# Altium PCB PCB.PcbDoc
Units mil, origin at the board's own origin, x right, y up, seen from the top; angles counter-clockwise.
Board outline 1633.86 x 2559.06 mil, 4 copper layers (Top Layer, Internal Plane 1, Internal Plane 2, Bottom Layer), stack 30.635 mil thick; 44 components, 29 nets, 160 pads, 110 vias.
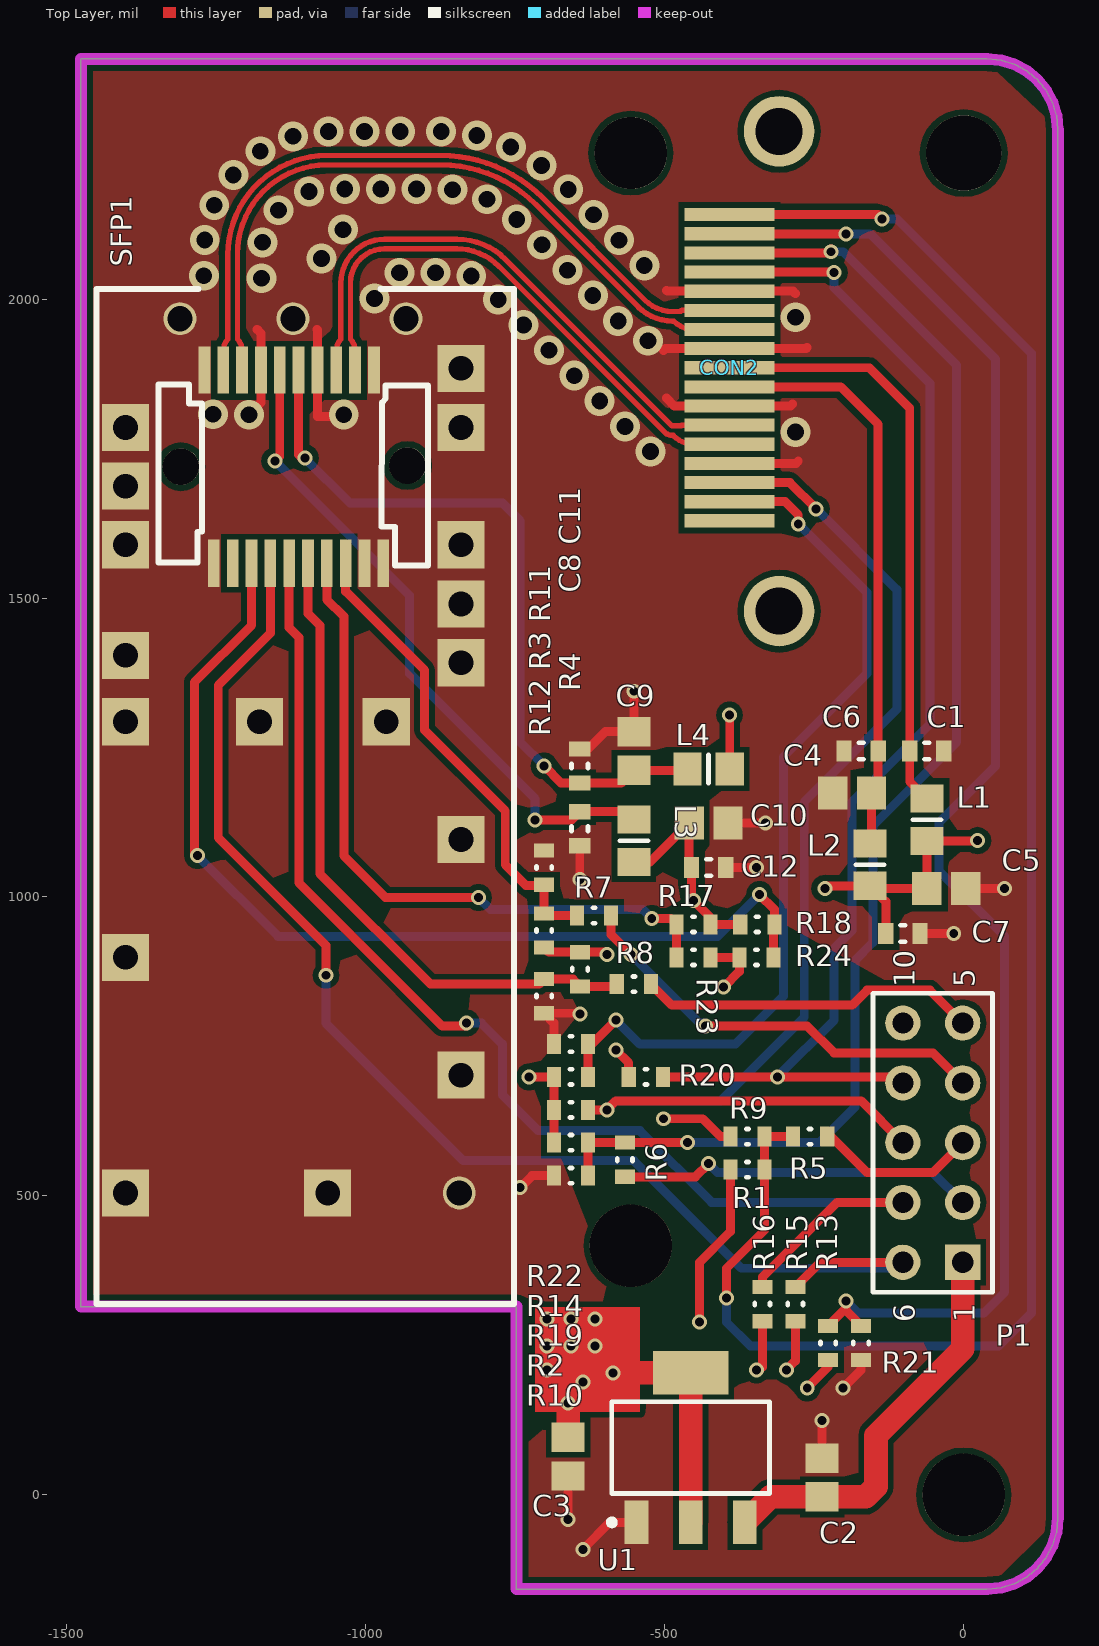
[diagram p0: Top Layer view]
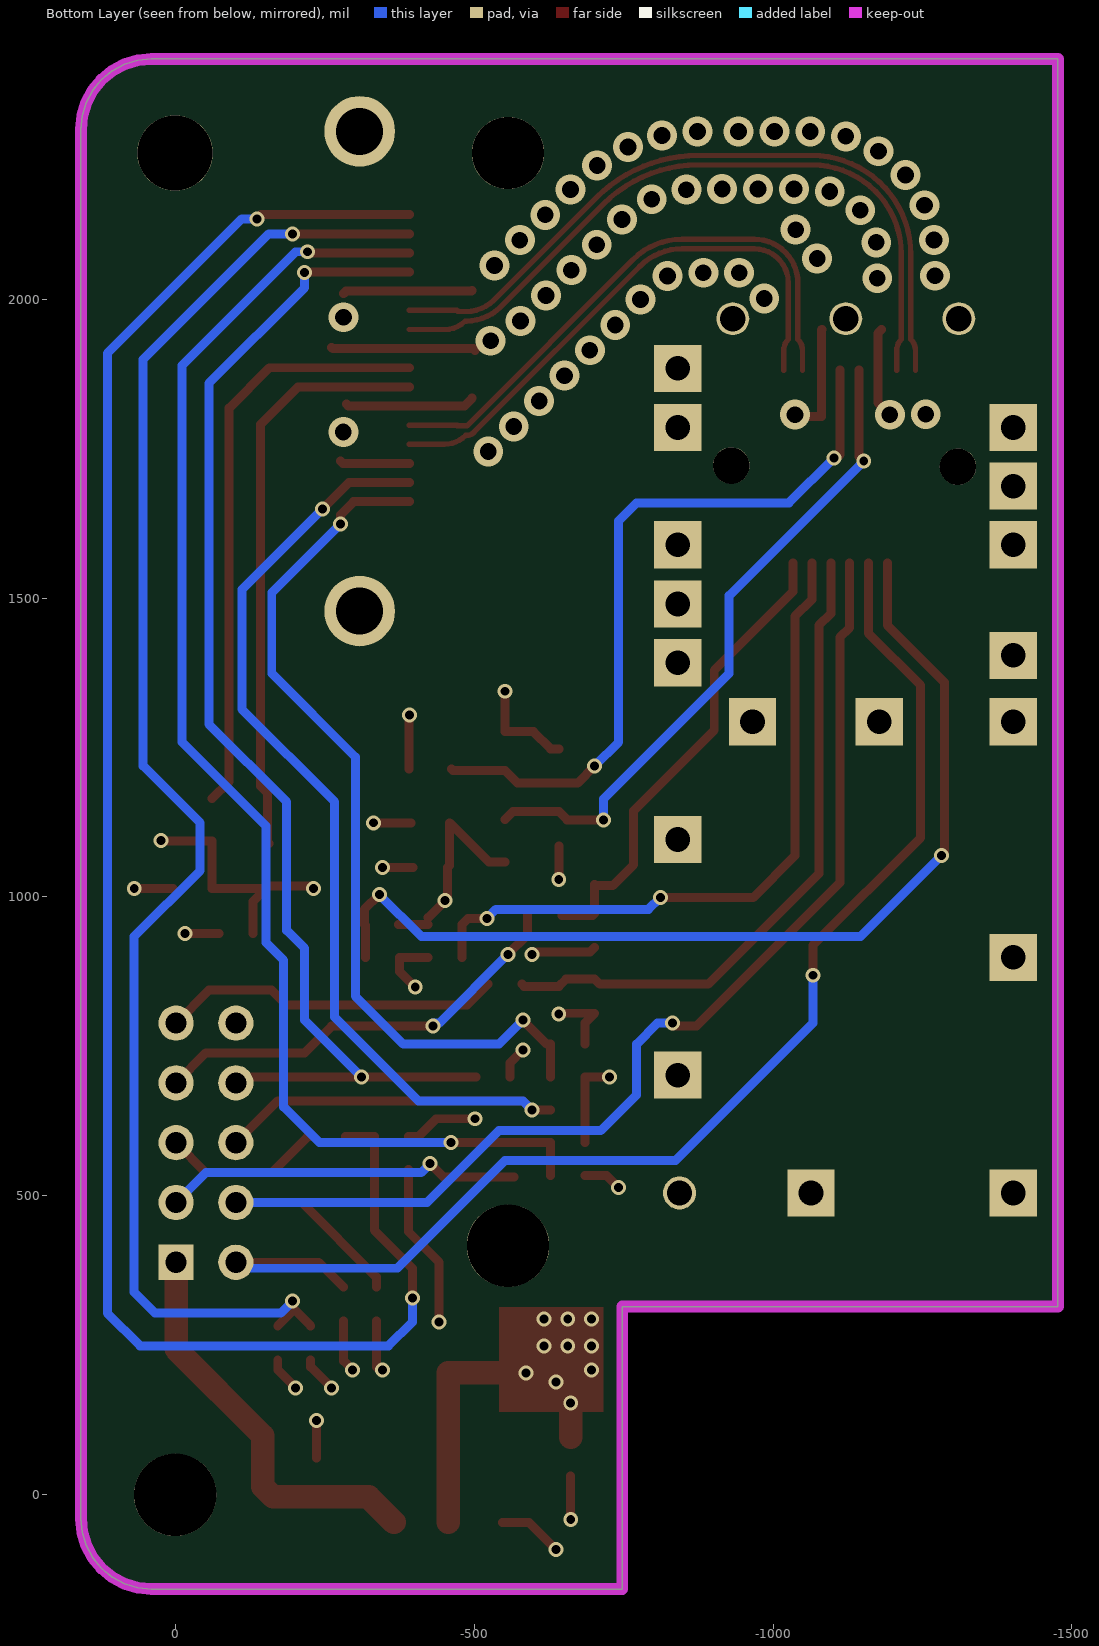
[diagram p1: Bottom Layer view, seen from below]
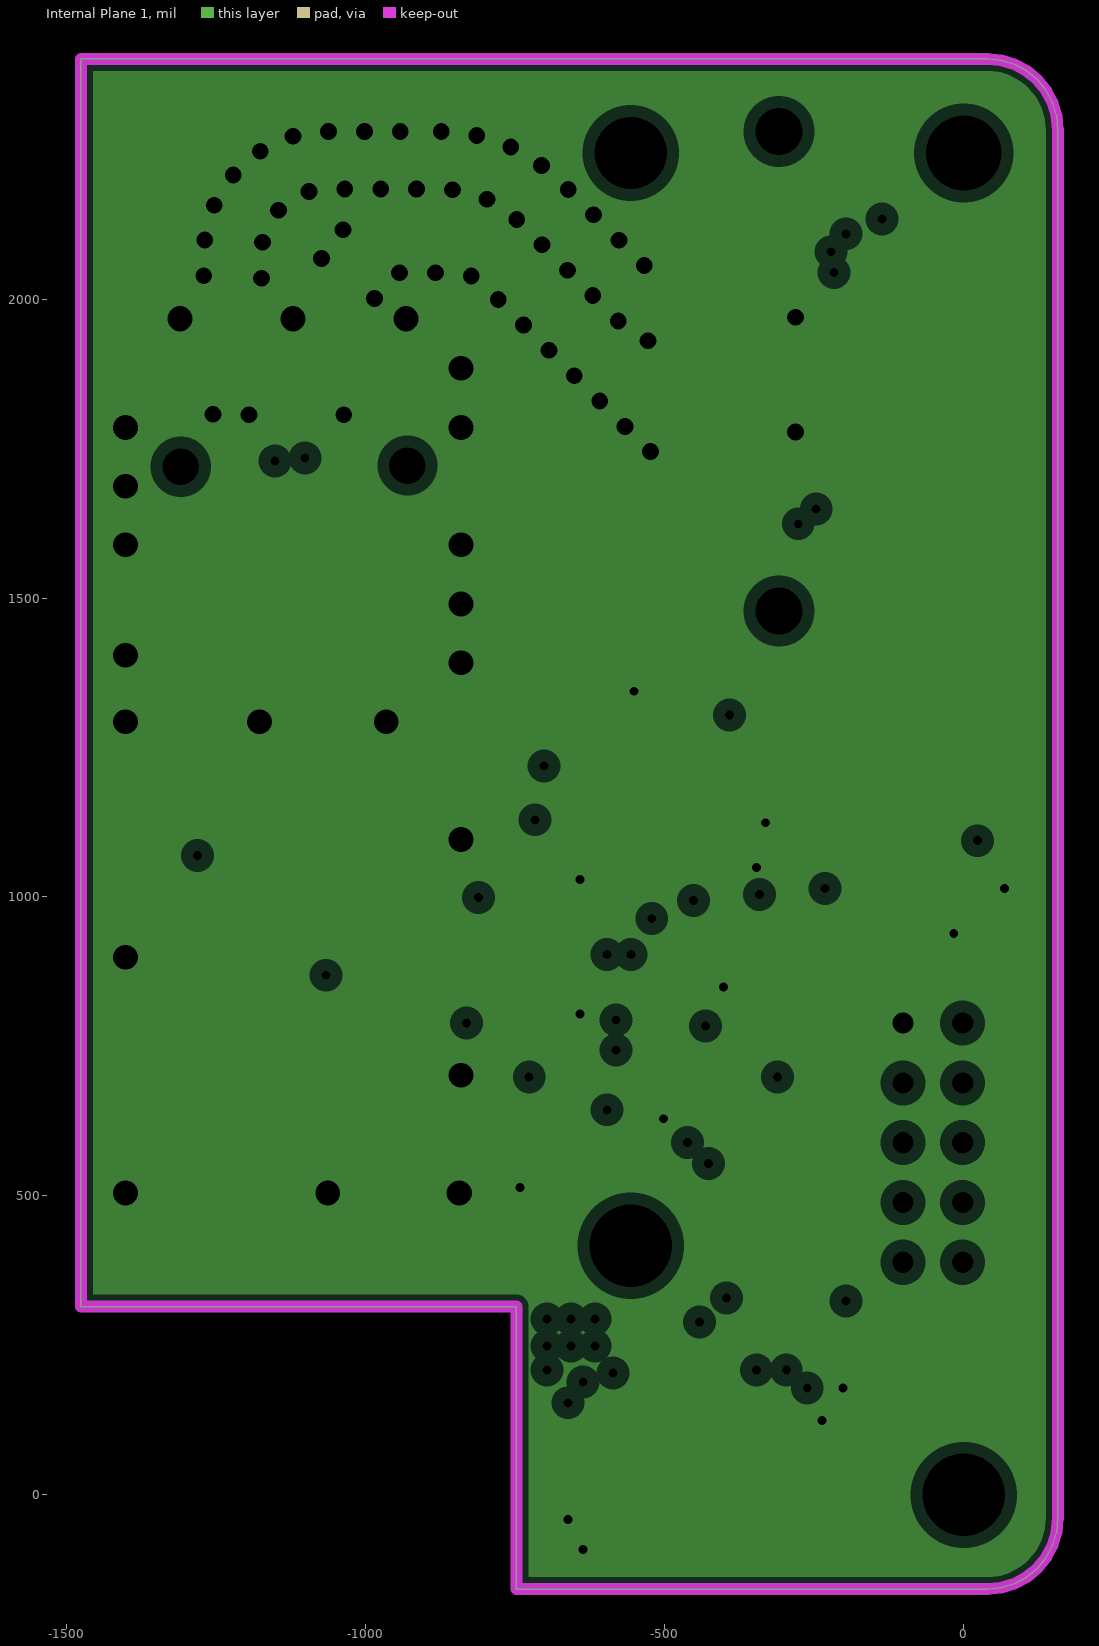
[diagram p2: Internal Plane 1, clearances drawn from the general rule]
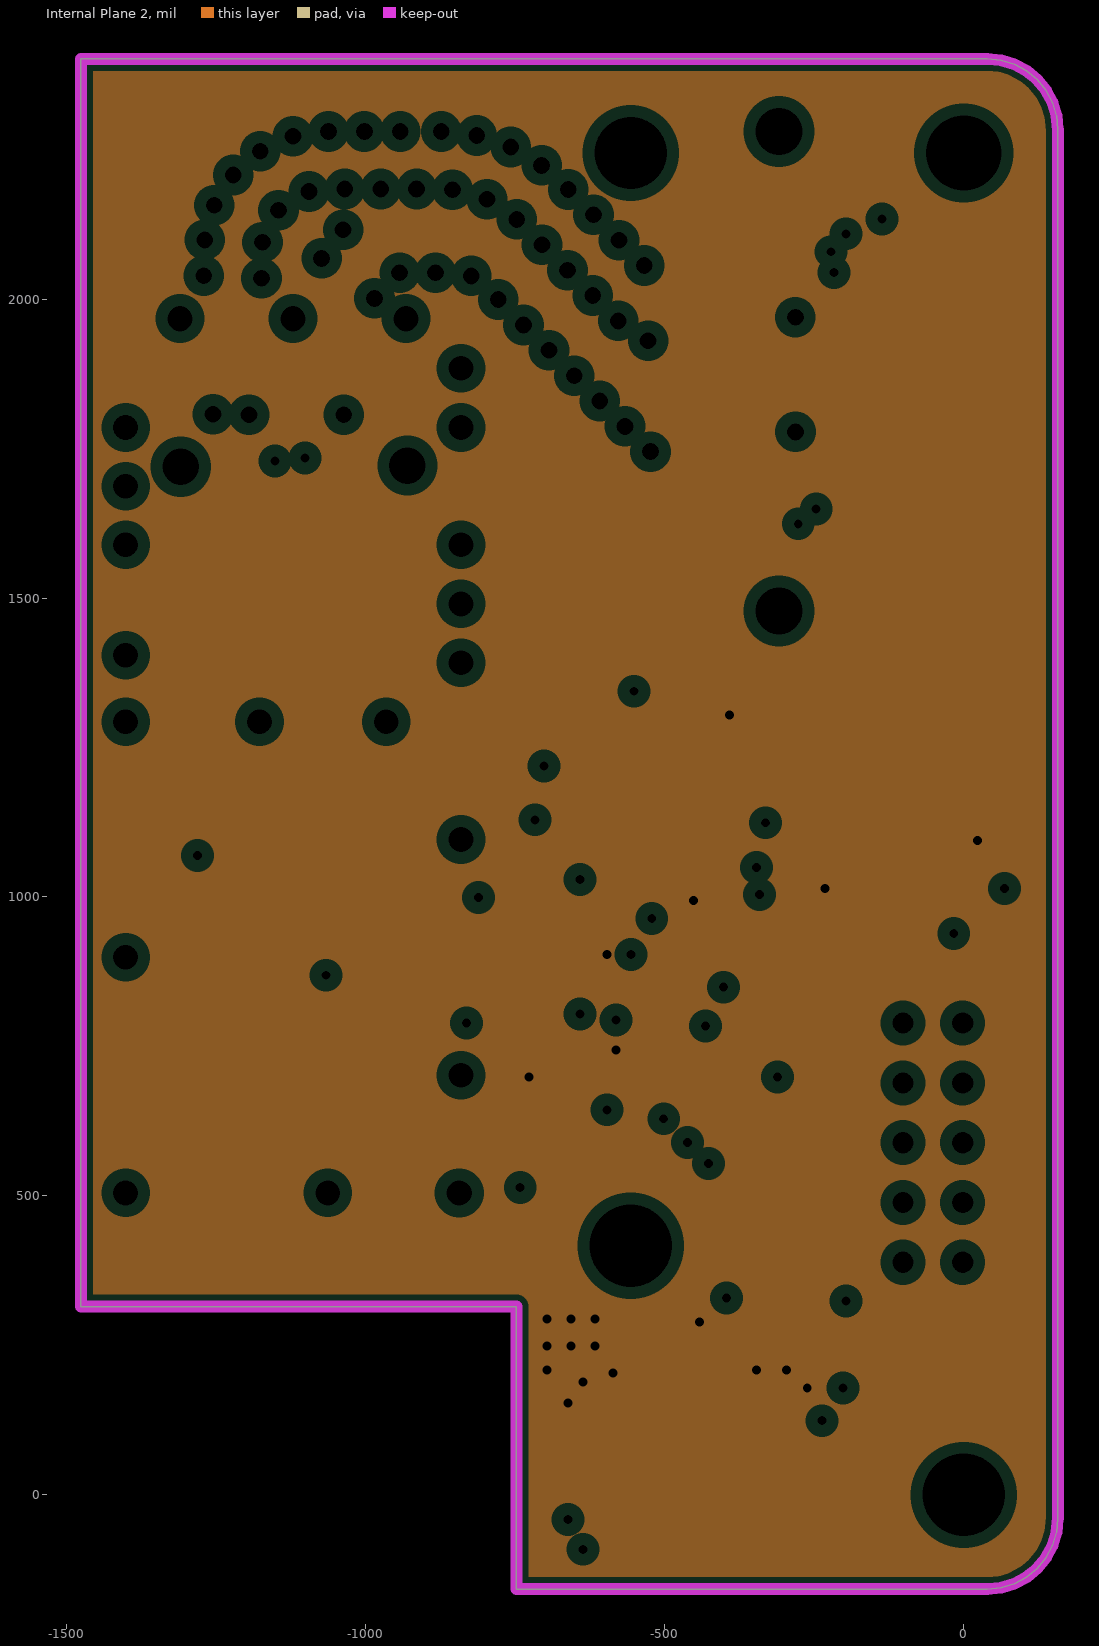
[diagram p3: Internal Plane 2, clearances drawn from the general rule]
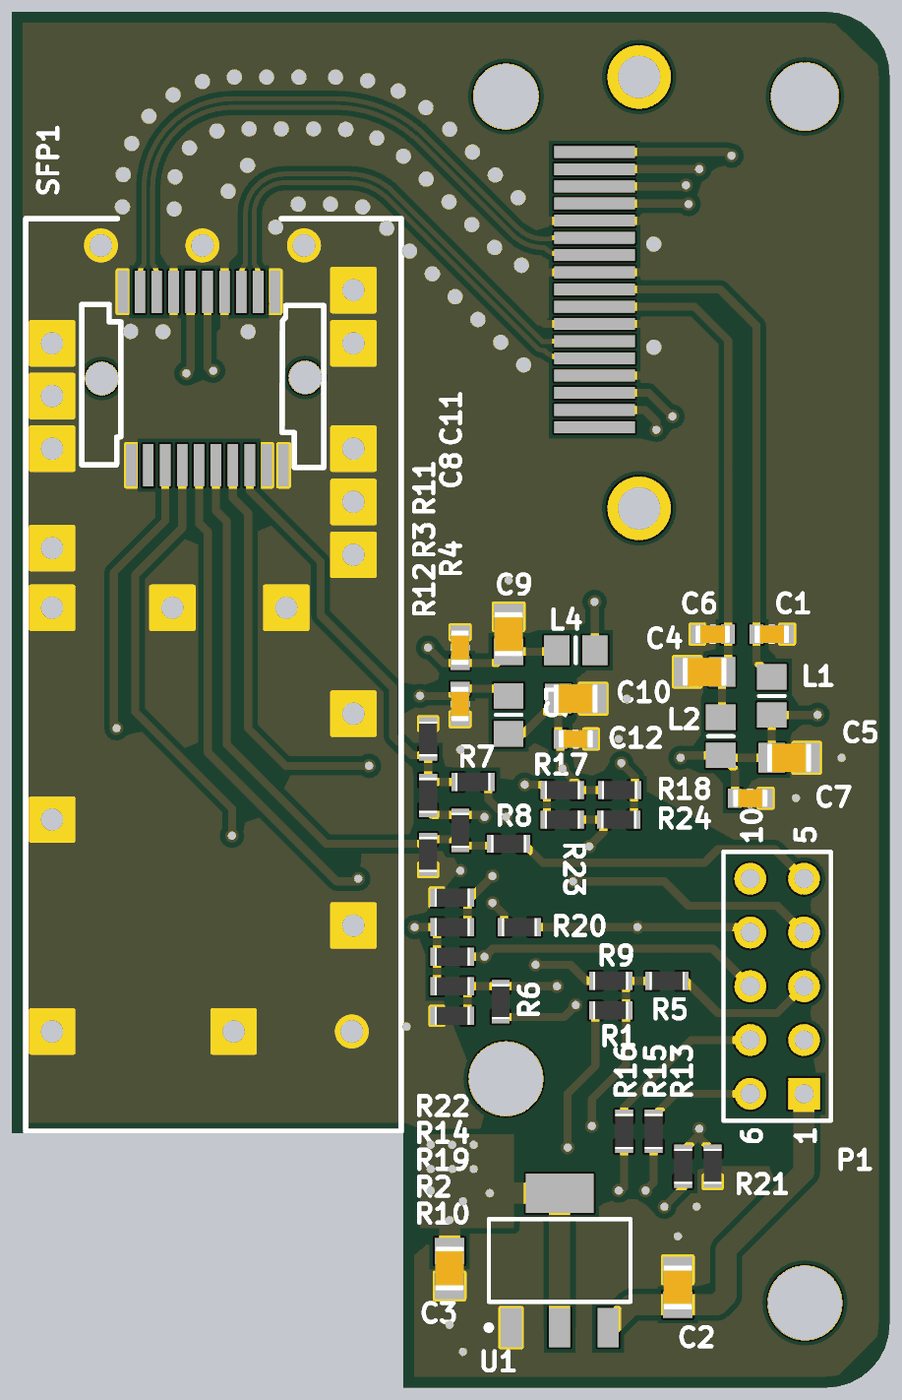
[diagram p4: 3D render of the assembled board from above, using the file's embedded part models]

## Layer stack, top to bottom
Top Solder: solder mask 0.4, Solder Resist, Dk 3.5
Top Layer: signal copper 1.4
Dielectric 1: core 10, FR-4, Dk 4.2
Internal Plane 1: plane copper 1.4173, net GND
Dielectric 3: prepreg 5, Dk 4.2
Internal Plane 2: plane copper 1.4173, net +3V3
Dielectric 2: core 10, FR-4, Dk 4.2
Bottom Layer: signal copper 1.4
Bottom Solder: solder mask 0.4, Solder Resist, Dk 3.5

## Board outline
39.37,2401.57 -1476.38,2401.57 -1476.38,314.96 -748.03,314.96 -748.03,-157.48 39.37,-157.48 62.41,-155.21 84.57,-148.49 104.99,-137.58 122.89,-122.89 137.58,-104.99 148.49,-84.57 155.21,-62.41 157.48,-39.37 157.48,2283.46 155.21,2306.51 148.49,2328.66 137.58,2349.08 122.89,2366.98 104.99,2381.67 84.57,2392.58 62.41,2399.31

## Design rules (kind name [scope] priority, off if disabled: settings)
Clearance Clearance_diff_polygon [InPolygon] p1: gap=10
Clearance [All] p2: gap=6
Clearance Clearance_nets_poligon [InNamedPolygon('') vs not InNet('GND')] p3 off: gap=10
Clearance Clearance_diff_gnd [(InDifferentialPairClass('All Differential Pairs')) and not (InPadClass('All Pads')) vs InNet('GND')] p4: gap=10
Clearance Clearance_diff_gnd_pad [(InDifferentialPairClass('All Differential Pairs')) vs IsPad and InNet('GND')] p5: gap=10
ComponentClearance [All] p1: gap=0 collisioncheckmode=3 verticalgap=0 showdistances=TRUE
DiffPairsRouting [All] p1: maxlimit=7.1 minlimit=6.9 mostfreqgap=7 toplayer_minwidth=8 toplayer_maxwidth=9 toplayer_prefwidth=8.5 bottomlayer_minwidth=8 bottomlayer_maxwidth=9 bottomlayer_prefwidth=8.5 maxuncoupledlength=200
HoleSize [All] p1: absolutevalues=TRUE maxlimit=196.85 minlimit=11.81 maxpercent=80.000 minpercent=20.000
MatchedLengths camera [InDifferentialPairClass('CAMERA_DIFF')] p1: tolerance=10 checknetsindiffpair=TRUE checkdiffpairvsdiffpair=FALSE checkxsignals=FALSE checkothers=FALSE
MinimumSolderMaskSliver [All] p1: minsoldermaskwidth=1.97
PlaneClearance [All] p1: clearance=20
PlaneConnect [All] p1: planeconnectstyle=Direct reliefexpansion=20 reliefentries=2 reliefconductorwidth=10 reliefairgap=10
PolygonConnect [All] p1: connectstyle=Direct reliefconductorwidth=10 reliefentries=4 polygonreliefangle="90 Angle" airgapwidth=10
RoutingVias [All] p1: holewidth=14.96 width=25 viastyle="Through Hole" minholewidth=11.81 minwidth=20 maxholewidth=28 maxwidth=50
SilkToSolderMaskClearance [IsPad] p1: minsilkscreentomaskgap=0 clearancetoexposedcopper=TRUE
SolderMaskExpansion [All] p1: expansion=4
Width [All] p1: maxlimit=78.74 minlimit=6 preferedwidth=8 minimp=50.000000 maximp=50.000000 favimp=50.000000
23 further rules are at their usual default settings.

## Classes and differential pairs
net class TD: TD_N TD_P
net class RD: RD_N RD_P
differential pair TD: +TD_P -TD_N
differential pair RD: +RD_P -RD_N

## Components (designator, comment, footprint, x,y, rotation, side; value= is the part's Value field where it differs from the comment)
C1 "100nF" CAP0603 -61.69,1244.09 r180 top
C2 "10uF" CAP0805 -236.69,29.09 r90 top
C3 "10uF" CAP0805 -661.69,64.09 r270 top
C4 "10uF" CAP0805 -186.69,1174.09 r180 top
C5 "10uF" CAP0805 -29.21,1014.09 r0 top
C6 "100nF" CAP0603 -171.69,1244.09 r0 top
C7 "100nF" CAP0603 -101.69,939.09 r180 top
C8 "100nF" CAP0603 -642.13,1114.09 r90 top
C9 "10uF" CAP0805 -551.69,1244.09 r90 top
C10 "10uF" CAP0805 -426.69,1124.09 r0 top
C11 "100nF" CAP0603 -642.13,1219.09 r270 top
C12 "100nF" CAP0603 -426.69,1049.09 r180 top
CON2 "SFP receptacle (no cage)" "SFP PCB CON" -391.69,1629.09 r90 top (schematic designator CON1)
L1 "1uH" 6-0805_N -61.69,1129.09 r270 top
L2 "1uH" 6-0805_N -156.69,1054.09 r270 top
L3 "1uH" 6-0805_N -551.69,1094.09 r270 top
L4 "1uH" 6-0805_N -426.69,1214.09 r0 top
P1 "Header 5X2A" HDR2X5_CEN -1.69,389.09 r90 top locked
R1 "0R" RES0603 -361.69,544.09 r0 top
R2 "0R" RES0603 -656.69,589.09 r0 top
R3 "0R" RES0603 -701.69,944.09 r90 top
R4 "0R" RES0603 -641.69,879.09 r270 top
R5 "0R" RES0603 -256.69,599.09 r0 top
R6 "0R" RES0603 -566.69,560.55 r270 top
R7 "0R" RES0603 -618.15,969.09 r0 top
R8 "0R" RES0603 -551.69,854.09 r0 top
R9 "0R" RES0603 -361.69,599.09 r180 top
R10 "0R" RES0603 -656.69,534.09 r180 top
R11 "0R" RES0603 -701.69,1049.09 r90 top
R12 "0R" RES0603 -701.69,834.09 r270 top
R13 "0R" RES0603 -226.69,254.09 r90 top
R14 "0R" RES0603 -656.69,699.09 r0 top
R15 "0R" RES0603 -281.69,319.09 r90 top
R16 "0R" RES0603 -336.69,319.09 r90 top
R17 "0R" RES0603 -451.69,954.09 r180 top
R18 "0R" RES0603 -345.24,954.09 r0 top
R19 "0R" RES0603 -656.69,644.09 r0 top
R20 "0R" RES0603 -531.69,699.09 r0 top
R21 "0R" RES0603 -171.69,254.09 r270 top
R22 "0R" RES0603 -656.69,754.09 r180 top
R23 "0R" RES0603 -451.69,899.09 r0 top
R24 "0R" RES0603 -346.69,899.09 r180 top
SFP1 "SFP connector" PCB_SFP_COVER -1254.05,1558.16 r270 top
U1 "REG1117" TI-DCY4_N -456.69,79.09 r90 top

## Footprints (in the part's own frame and the unit in brackets; to place one, negate y for a bottom-side part, rotate by r counter-clockwise, add the part's x,y. Pads: shape width x height; smd on the part's side, far side on the other; paste and mask are expansions set on the pad)
6-0805_N [mm] "Chip Resistor, Body 2.0x1.2mm, IPC Medium Density"
  rect 1.2x1.4 smd: 1(-0.9,0) 2(0.9,0)
  silkscreen extent 0,-0.6 0,0.6, body extent -1.07,-0.7 1.07,0.7, height 0.7
CAP0603 [mm]
  rect 0.65x0.9 smd: 1(-0.725,0) 2(0.725,0)
  silkscreen extent -0.1,-0.35 0.1,0.35, body extent -0.82,-0.43 0.82,0.43, height 0.5
CAP0805 [mm]
  rect 1.25x1.4 smd: 1(-0.825,0) 2(0.825,0)
  body extent -1.05,-0.67 1.05,0.67, height 0.5
HDR2X5_CEN [mm] "Connector; Header; 5x2 Position"
  rect 1.5x1.5 hole 0.9: 1(0,0)
  round 1.5 hole 0.9: 2(2.54,0) 3(5.08,0) 4(7.62,0) 5(10.16,0) 6(0,2.54) 7(2.54,2.54) 8(5.08,2.54) 9(7.62,2.54) 10(10.16,2.54)
  silkscreen extent -1.27,-1.27 11.43,3.81
PCB_SFP_COVER [mm]
  rect 2x0.5 smd: 1(0,0) 2(0,0.8) 3(0,1.6) 4(0,2.4) 5(0,3.2) 6(0,4) 7(0,4.8) 8(0,5.6) 9(0,6.4) 10(0,7.2) 11(-8.2,6.8) 12(-8.2,6) 13(-8.2,5.2) 14(-8.2,4.4) 15(-8.2,3.6) 16(-8.2,2.8) 17(-8.2,2) 18(-8.2,1.2) 19(-8.2,0.4) 20(-8.2,-0.4)
  round 1.4 hole 1.067: 21(-10.387,8.163) 21(-10.387,-1.439) 21(-10.387,3.361) 21(26.75,10.425)
  rect 2x2 hole 1.05: 21(-8.279,10.499) 21(-5.764,10.499) 21(-5.764,-3.75) 21(-3.275,-3.75) 21(-0.786,10.499) 21(-0.786,-3.75) 21(1.729,10.499) 21(3.913,-3.75) 21(4.229,10.499) 21(6.733,7.324) 21(6.733,-3.75) 21(6.733,1.94) 21(11.736,10.499) 21(16.74,-3.75) 21(21.744,10.499) 21(26.748,-3.75) 21(26.748,4.835)
  round 1.55 hole 1.55: 35(-4.15,8.225) 36(-4.1,-1.4)
  silkscreen extent -11.66,-4.99 31.47,12.76
RES0603 [mm]
  rect 0.6x0.85 smd: 1(-0.725,0) 2(0.725,0)
  silkscreen extent -0.05,-0.33 0.05,0.33, body extent -0.82,-0.43 0.82,0.43, height 0.5
"SFP PCB CON" [mil] "SFP connector for flex to rigid PCB solder"
  rect 22x150 smd: 2(0,0) 3(32,0) 4(64,0) 5(416,0) 6(448,0) 7(480,0) 8(512,0) 11(384,0) 12(352,0) 13(320,0) 14(288,0) 15(256,0) 16(224,0) 17(192,0) 18(160,0) 19(128,0) 20(96,0)
TI-DCY4_N [mm] "SOT223, 4-Leads, Body 6.5x3.5mm, Pitch 2.3mm, IPC Medium Density"
  rect 1.85x1 smd: 1(-3.175,2.3) 2(-3.175,0) 3(-3.175,-2.3)
  rect 1.85x3.2 smd: 4(3.175,0)
  silkscreen extent -3.3,-3.35 1.95,3.47, body extent -1.85,-3.35 1.85,3.35, height 1.8

## Part data
C1 C6 C7 C8 C11 C12: library part Cap, "Capacitor"
C2 C3 C4 C5 C9 C10: library part "Cap Pol1", "Polarized Capacitor (Radial)"
CON2: library part "SFP connector", "SFP receptacle, woutout cage, standard orientation of SFP module"
L1 L2 L3 L4: library part Inductor, "Inductor"
P1: "Header, 5-Pin, Dual row"
R1 R2 R3 R4 R5 R6 R7 R8 R9 R10 R11 R12 R13 R14 R15 R16 R17 R18 R19 R20 R21 R22 R23 R24: library part Res1, "Resistor"
U1: "Single Output LDO, 800 mA, Adjustable 1.5 to 13.5 V Output, 3.8 to 15 V Input, with Internal Current Limiting, 4-pin SOT-223 (DCY), -40 to 125 degC, Green (RoHS & no Sb/Br)"

## Free pads (board coordinates)
  round 137.8 hole 137.8: 1(-556.69,416.93) 1(0,0)
  round 120.97 hole 120.97: 1(-556.69,2244.09)
  round 118.11 hole 78.74: 1(-308.69,1478.09) 1(-308.69,2280.46)
  round 125.98 hole 125.98: 1(0,2244.09)

## Via types
v1: diameter 50, hole 28, Top Layer to Bottom Layer, tented both sides, 50 vias
v2: diameter 25, hole 14.96, Top Layer to Bottom Layer, tented both sides, 47 vias
v3: diameter 25, hole 15, Top Layer to Bottom Layer, tented both sides, 13 vias

## Nets (pads, with @x,y where several pads share a name; then routed paths per layer and width w, separated by ;. In a path a pad name is that pad's centre, name@x,y a point inside that pad or via, vN(x,y) a via of type N, cw(c..) or ccw(c..) an arc to the next point about the centre after c; other vN are vias at no path point)
+3V3: C3.1 C5.1 C7.2 C10.1 C12.2 L1.2 L2.2 L3.2 L4.2 R1.1 R2.1 R3.1 R4.1 R13.1 R14.1 R15.1 R16.1 R17.1 R18.1 R19.1 R20.1 U1.2 U1.4 | length 2229.3
  Top Layer w8: R17.1 R17.1@-423.15,965.55
  Top Layer w15: v2(-726.69,699.09) R14.1 R19.1 R2.1 ; R3.1 -693.78,907.64 R4.1 -600.24,907.64 v2(-596.69,904.09) ; v2(-581.69,744.09) -560.24,722.64 R20.1 ; L3.2 -524.61,1058.66 C10.1 -459.17,1053.03 C12.2 -455.24,997.64 v2(-451.69,994.09) R17.1@-423.15,965.55 ; v2(-441.69,289.09) -441.69,389.09 -390.24,440.55 R1.1 ; R17.1 R18.1 ; v2(-391.69,1304.09) -391.26,1303.66 L4.2 ; v3@-341.69,209.09 -336.69,214.09 R16.1 ; v3(-296.69,209.09) -281.69,224.09 R15.1 ; v2(-261.69,179.09) -226.69,214.09 R13.1 ; v2(-231.69,1014.09) -227.13,1018.66 L2.2 L2.2@-152.13,1014.09 ; C7.2 -130.24,992.2 L2.2@-152.13,1014.09 ; v2(23.31,1094.09) 22.87,1093.66 L1.2 C5.1 L2.2@-152.13,1014.09
  Top Layer w39.37: C3.1 v3(-661.69,154.09) -661.69,164.09 v3(-636.69,189.09) -621.69,204.09 v3(-586.69,204.09) U1.4 U1.2
  other v3: -696.69,209.09 -346.69,209.09 -696.69,249.09 -656.69,249.09 -616.69,249.09 -696.69,294.09 -656.69,294.09 -616.69,294.09
+5V: C2.1 P1.1 U1.3 | length 679.4
  Top Layer w39.37: U1.3 -323.62,-3.39 C2.1 -164.17,-3.39 -146.69,14.09 -146.69,99.09 -1.69,244.09 P1.1
GND: C1.1 C2.2 C3.2 C4.2 C5.2 C6.1 C7.1 C8.1 C9.2 C10.2 C11.1 C12.1 CON2.11 CON2.14 CON2.17 CON2.20 P1.10 R9.2 R10.2 R11.2 R12.2 R21.2 R22.2 R23.2 R24.2 SFP1.1 SFP1.9 SFP1.10 SFP1.11 SFP1.14 SFP1.17 SFP1.20 SFP1.21 U1.1 | length 2318
  Top Layer w15: v1(-1195.35,1806.53) -1175.31,1826.57 SFP1.17 -1175.31,1942.72 -1181.69,1949.09 ; -1081.69,1949.09 -1080.83,1948.23 SFP1.14 -1080.83,1803.23 -1040.29,1803.23 v1(-1036.85,1806.67) ; v2(-741.69,514.09) -721.69,534.09 R10.2 ; R22.2 -685.24,789.09 R12.2 -643.15,805.55 v2(-641.69,804.09) ; v2(-661.69,-40.91) C3.2 ; C8.1 -642.13,1029.53 v2(-641.69,1029.09) ; C11.1 -628.15,1247.64 -599.21,1276.57 C9.2 v2(-551.69,1344.09) ; v2(-636.69,-90.91) -591.69,-45.91 U1.1 ; v2(-501.69,629.09) -436.69,629.09 -406.69,599.09 R9.2 ; -501.69,1914.09 -498.69,1917.09 CON2.14 -263.69,1917.09 -261.69,1919.09 ; -496.69,1834.09 -483.69,1821.09 CON2.17 -289.69,1821.09 -286.69,1824.09 ; -496.69,2014.09 -495.69,2013.09 CON2.11 -285.69,2013.09 -281.69,2009.09 ; R23.2 R24.2 -375.24,875.55 v2(-401.69,849.09) ; C12.1 v2(-346.69,1049.09) ; C10.2 v2(-331.69,1124.09) ; CON2.20 -280.69,1725.09 -276.69,1729.09 ; C2.2 v3(-236.69,124.09) ; v2(-201.69,179.09) -171.69,209.09 R21.2 ; C7.1 v2(-16.69,939.09) ; C5.2 v2(68.31,1014.09)
  other v1: -523.67,1744.88 -281.43,1777.8 -566.41,1786.99 -1255.35,1807.27 -608.83,1829.42 -651.26,1871.85 -693.68,1914.27 -527.84,1930.29 -736.11,1956.7 -577.85,1963.44 -281.47,1969.49 -778.54,1999.13 -985.41,2001.08 -620.28,2005.87 -1174.39,2034.82 -1270.73,2038.92 -823.63,2038.7 -943.41,2043.92 -883.41,2043.92 -662.7,2048.29 -534.15,2055.99 -1073.86,2067.94 -705.13,2090.72 -1172.68,2094.8 -1269.19,2098.9 -576.58,2098.42 -1037.92,2115.98 -747.55,2133.16 -619,2140.84 -1145.96,2148.52 -1253.36,2156.77 -797.16,2166.9 -1094.83,2179.92 -854.97,2182.94 -1034.97,2183.92 -974.97,2183.92 -914.97,2183.92 -661.43,2183.27 -1221.4,2207.55 -705.93,2223.52 -1176.27,2247.09 -757.39,2254.37 -1121.73,2272.1 -814.22,2273.61 -1062.29,2280.27 -1002.29,2280.27 -942.29,2280.27 -873.86,2280.15
LOS_1: CON2.8 R1.2 R5.1 R9.1 | length 3139.7
  Top Layer w15: v2(-396.69,329.09) -396.69,379.09 -333.15,442.64 R1.2 R9.1 R5.1 ; CON2.8 -143.69,2141.09 v2(-136.69,2134.09)
  Bottom Layer w15: v2(-396.69,329.09) -396.69,289.09 -356.69,249.09 58.31,249.09 113.31,304.09 113.31,1909.09 -111.69,2134.09 v2(-136.69,2134.09)
LOS_2: R3.2 R7.1 R11.1 SFP1.8 | length 799.1
  Top Layer w15: SFP1.8 -1033.58,1510.98 -901.69,1379.09 -901.69,1279.09 -766.69,1144.09 -766.69,1054.09 -731.69,1019.09 -703.15,1019.09 R11.1 R3.2 -698.15,969.09 R7.1
MOD_DEF0_1: CON2.6 R2.2 R6.1 R10.1 | length 2303.3
  Top Layer w15: R10.1 R2.2 R6.1 v2(-461.69,589.09) ; CON2.6 -228.69,2077.09 -221.69,2084.09 v2(-221.69,2079.09)
  Bottom Layer w15: v2(-461.69,589.09) -241.69,589.09 -181.69,649.09 -181.69,894.09 -151.69,924.09 -151.69,1119.09 -11.69,1259.09 -11.69,1889.09 -201.69,2079.09 v2(-221.69,2079.09)
MOD_DEF0_2: R4.2 R8.1 R12.1 SFP1.6 | length 1110.4
  Top Layer w15: SFP1.6 -1096.57,1473.98 -1076.69,1454.09 -1076.69,1039.09 -891.69,854.09 -710.24,854.09 R12.1 -653.78,862.64 R4.2 -583.78,850.55 R8.1
MOD_DEF1_1: CON2.5 P1.9 R20.2 | length 2097.9
  Top Layer w15: R20.2 v2(-311.69,699.09) -111.69,699.09 P1.9 ; CON2.5 -217.69,2045.09 v2(-216.69,2044.09)
  Bottom Layer w15: v2(-311.69,699.09) -216.69,794.09 -216.69,914.09 -186.69,944.09 -186.69,1159.09 -56.69,1289.09 -56.69,1859.09 -216.69,2019.09 v2(-216.69,2044.09)
MOD_DEF1_2: P1.7 R16.2 SFP1.5 | length 2127.5
  Top Layer w15: SFP1.5 -1128.07,1450.47 -1111.69,1434.09 -1111.69,1024.09 -871.69,784.09 v2@-831.69,784.09 ; R16.2 -336.69,364.09 -211.69,489.09 P1.7
  Bottom Layer w15: v2(-831.69,789.09) -806.69,789.09 -771.69,754.09 -771.69,669.09 -711.69,609.09 -541.69,609.09 -421.69,489.09 P1.7
MOD_DEF2_1: CON2.4 P1.8 R19.2 | length 2089.2
  Top Layer w15: R19.2 v2(-596.69,644.09) -581.69,659.09 -171.69,659.09 P1.8 ; CON2.4 -290.69,1693.09 v2(-246.69,1649.09)
  Bottom Layer w15: v2(-596.69,644.09) -581.69,659.09 -406.69,659.09 -266.69,799.09 -266.69,1159.09 -111.69,1314.09 -111.69,1514.09 v2(-246.69,1649.09)
MOD_DEF2_2: P1.6 R15.2 SFP1.4 | length 2215.9
  Top Layer w15: SFP1.4 -1159.57,1441.22 -1246.69,1354.09 -1246.69,1099.09 -1066.69,919.09 v2(-1066.69,869.09) ; R15.2 -240.24,389.09 P1.6
  Bottom Layer w15: v2(-1066.69,869.09) -1066.69,789.09 -836.69,559.09 -551.69,559.09 -371.69,379.09 -111.69,379.09 P1.6
RATE_SEL_1: CON2.7 R13.2 R21.1 | length 2558.9
  Top Layer w15: CON2.7 v2(-196.69,2109.09) ; R13.2 v2@-196.69,312.64 ; v2(-196.69,324.09) v2@-196.69,312.64 ; R21.1 -196.69,307.64 v2@-196.69,312.64
  Bottom Layer w15: v2(-196.69,324.09) -176.69,304.09 33.31,304.09 68.31,339.09 68.31,934.09 -41.69,1044.09 -41.69,1124.09 53.31,1219.09 53.31,1899.09 -156.69,2109.09 v2(-196.69,2109.09)
RATE_SEL_2: R17.2 R23.1 SFP1.7 | length 1159.9
  Top Layer w15: SFP1.7 -1065.08,1497.48 -1036.69,1469.09 -1036.69,1069.09 -966.69,999.09 v2(-811.69,999.09) ; v2(-521.69,964.09) -490.24,964.09 R17.2 R23.1
  Bottom Layer w15: v2(-811.69,999.09) -791.69,979.09 -536.69,979.09 v2(-521.69,964.09)
RD_N: CON2.19 SFP1.12 | length 942.9
  Top Layer w9: SFP1.12 -1017.83,1913.9 ccw(c-1044.29,1913.9) -1025.58,1932.61 -1025.58,2027.12 cw(c-968.61,2027.12) -968.61,2084.09 -848.11,2084.09 cw(c-848.11,1984.09) -777.4,2054.8 -499.19,1776.59 ccw(c-487.88,1787.91) -487.88,1771.91 -486.01,1771.91 ccw(c-450.24,1807.67) -450.24,1757.09 CON2.19
RD_P: CON2.18 SFP1.13 | length 964.3
  Top Layer w9: SFP1.13 -1049.33,1913.9 cw(c-1022.88,1913.9) -1041.58,1932.61 -1041.58,2026.83 cw(c-968.32,2026.83) -1026.03,2071.96 cw(c-968.32,2026.83) -968.32,2100.09 -848.11,2100.09 cw(c-848.11,1984.09) -766.09,2066.12 -487.88,1787.91 -474.06,1787.91 ccw(c-474.06,1791.96) -471.19,1789.09 CON2.18
SFP_LOS_1: P1.3 R5.2 | length 272
  Top Layer w15: R5.2 -221.69,599.09 -161.69,539.09 -51.69,539.09 P1.3
SFP_LOS_2: P1.4 R7.2 | length 725.6
  Top Layer w15: R7.2 -589.61,937.01 v2(-556.69,904.09) ; v2(-431.69,784.09) -261.69,784.09 -216.69,739.09 -51.69,739.09 P1.4
  Bottom Layer w15: v2(-556.69,904.09) -441.69,789.09 -431.69,789.09 v2(-431.69,784.09)
SFP_MOD_DEF0_1: P1.2 R6.2 | length 601.1
  Top Layer w15: R6.2 -448.78,532.01 v2(-426.69,554.09)
  Bottom Layer w15: v2(-426.69,554.09) -411.69,539.09 -51.69,539.09 P1.2
SFP_MOD_DEF0_2: P1.5 R8.2 | length 569.1
  Top Layer w15: R8.2 -488.15,819.09 -186.69,819.09 -161.69,844.09 -56.69,844.09 P1.5
TD_N: CON2.12 SFP1.19 | length 1224.3
  Top Layer w9: SFP1.19 -1238.31,1913.9 cw(c-1211.85,1913.9) -1230.56,1932.61 -1230.56,2074.36 cw(c-1064.83,2074.36) -1064.83,2240.09 -874.85,2240.09 cw(c-874.85,1999.2) -704.51,2169.54 -533.42,1998.45 ccw(c-486.69,2045.18) -486.69,1979.09 -476.02,1979.09 ccw(c-476.02,1985.92) -471.19,1981.09 CON2.12
TD_P: CON2.13 SFP1.18 | length 1203
  Top Layer w9: SFP1.18 -1206.81,1913.9 ccw(c-1233.26,1913.9) -1214.56,1932.61 -1214.56,2075.4 cw(c-1065.86,2075.4) -1065.86,2224.09 -873.92,2224.09 cw(c-873.92,2001.43) -716.48,2158.88 -544.73,1987.14 ccw(c-486.69,2045.18) -486.69,1963.09 -485.19,1963.09 ccw(c-451.39,1996.89) -451.39,1949.09 CON2.13
TX_DISABLE_1: CON2.3 R14.2 R22.1 | length 1482.5
  Top Layer w15: R14.2 R22.1 -621.69,754.09 v2(-581.69,794.09) ; CON2.3 -298.69,1661.09 -276.69,1639.09 v2(-276.69,1624.09)
  Bottom Layer w15: v2(-581.69,794.09) -541.69,754.09 -381.69,754.09 -301.69,834.09 -301.69,1234.09 -161.69,1374.09 -161.69,1509.09 v2(-276.69,1624.09)
TX_DISABLE_2: R18.2 R24.1 SFP1.3 | length 1671.6
  Top Layer w15: v2(-1281.69,1069.09) -1286.69,1074.09 -1286.69,1359.09 -1191.06,1454.72 SFP1.3 ; v2(-341.69,1004.09) -316.69,979.09 R18.2 -318.15,952.64 R24.1
  Bottom Layer w15: v2(-1281.69,1069.09) -1146.69,934.09 -411.69,934.09 v2(-341.69,1004.09)
TX_FAULT_1: CON2.2
TX_FAULT_2: SFP1.2
VCCR_1: C4.1 C6.2 CON2.16 L2.1 | length 981.1
  Top Layer w15: CON2.16 -205.69,1853.09 -143.15,1790.55 C6.2 -143.15,1185.16 C4.1 -154.21,1092.01 L2.1
VCCR_2: C9.1 C11.2 L4.1 SFP1.15 | length 1245.4
  Top Layer w15: SFP1.15 -1112.32,1739.72 -1106.69,1734.09 v2(-1101.69,1734.09) ; v2(-701.69,1219.09) -673.15,1190.55 C11.2 -572.76,1190.55 C9.1 -464.61,1211.61 L4.1
  Bottom Layer w15: v2(-1101.69,1734.09) -1026.69,1659.09 -771.69,1659.09 -741.69,1629.09 -741.69,1259.09 v2(-701.69,1219.09)
VCCT_1: C1.2 CON2.15 L1.1 | length 994.3
  Top Layer w15: CON2.15 -157.69,1885.09 -90.24,1817.64 C1.2 -90.24,1193.07 L1.1
VCCT_2: C8.2 L3.1 SFP1.16 | length 1111.4
  Top Layer w15: v2(-1151.69,1729.09) -1143.82,1736.97 SFP1.16 ; v2(-716.69,1129.09) -655.67,1129.09 C8.2 -564.8,1142.64 L3.1
  Bottom Layer w15: v2(-1151.69,1729.09) -926.69,1504.09 -926.69,1374.09 -716.69,1164.09 v2(-716.69,1129.09)
pads on no net: SFP1.35 SFP1.36

## Polygon pours and split planes (outlines as drawn)
GND on Top Layer "GND" (solid, pour order 2): -1476.38,2401.57 33.31,2401.57 157.48,2283.46 157.48,-39.37 39.37,-157.48 -748.03,-157.48 -748.03,314.96 -1476.38,314.96
GND on Internal Plane 1 (split plane): 58.47,2379.5 76.84,2373.93 93.77,2364.88 108.61,2352.7 120.78,2337.86 129.83,2320.94 135.4,2302.57 137.38,2282.48 137.38,-38.38 135.4,-58.47 129.83,-76.84 120.78,-93.77 108.61,-108.61 93.77,-120.78 76.84,-129.83 58.47,-135.4 38.38,-137.38 -727.93,-137.38 -727.93,314.96 -728.32,318.88 -729.46,322.65 -731.32,326.13 -733.82,329.17 -736.87,331.67 -740.34,333.53 -744.11,334.67 -748.03,335.06 -1456.28,335.06 -1456.28,2381.48 38.38,2381.48
+3V3 on Internal Plane 2 (split plane): 58.47,2379.5 76.84,2373.93 93.77,2364.88 108.61,2352.7 120.78,2337.86 129.83,2320.94 135.4,2302.57 137.38,2282.48 137.38,-38.38 135.4,-58.47 129.83,-76.84 120.78,-93.77 108.61,-108.61 93.77,-120.78 76.84,-129.83 58.47,-135.4 38.38,-137.38 -727.93,-137.38 -727.93,314.96 -728.32,318.88 -729.46,322.65 -731.32,326.13 -733.82,329.17 -736.87,331.67 -740.34,333.53 -744.11,334.67 -748.03,335.06 -1456.28,335.06 -1456.28,2381.48 38.38,2381.48

## Keep-outs
Keep-Out Layer:
  the board outline again, w19.68

## Other copper
Top Layer:
  rectangle net +3V3: -716.69,139.09 -541.69,314.09
  pour cut-out: -1.69,789.09 -1.69,254.09 -551.69,254.09 -726.69,699.09 -643.15,805.55 -521.69,964.09 -316.69,964.09

## Silkscreen, mask and mechanical layers (free items; w line width, h text height)
Mechanical 1:
  drawing of 368 lines, arcs and shapes, not listed
  text "Layer" at 1080.61,2745 h60
  text "Name" at 1490.52,2745 h60
  text "Material" at 2530.23,2745 h60
  text "Thickness" at 3390,2745 h60
  text "Constant" at 4039.84,2745 h60
  text "Board Layer Stack" at 4609.7,2745 h60
  text "1" at 1080.61,2625 h60
  text "Top Overlay" at 1490.52,2625 h60
  text "2" at 1080.61,2505 h60
  text "Top Solder" at 1490.52,2505 h60
  text "Solder Resist" at 2530.23,2505 h60
  text "0.40mil" at 3390,2505 h60
  text "3.5" at 4039.84,2505 h60
  text "3" at 1080.61,2385 h60
  text "Top Layer" at 1490.52,2385 h60
  text "Copper" at 2530.23,2385 h60
  text "1.40mil" at 3390,2385 h60
  text "4" at 1080.61,2265 h60
  text "Dielectric 1" at 1490.52,2265 h60
  text "FR-4" at 2530.23,2265 h60
  text "10.00mil" at 3390,2265 h60
  text "4.2" at 4039.84,2265 h60
  text "5" at 1080.61,2145 h60
  text "Internal Plane 1" at 1490.52,2145 h60
  text "Copper" at 2530.23,2145 h60
  text "1.42mil" at 3390,2145 h60
  text "6" at 1080.61,2025 h60
  text "Dielectric 3" at 1490.52,2025 h60
  text "5.00mil" at 3390,2025 h60
  text "4.2" at 4039.84,2025 h60
  text "7" at 1080.61,1905 h60
  text "Internal Plane 2" at 1490.52,1905 h60
  text "Copper" at 2530.23,1905 h60
  text "1.42mil" at 3390,1905 h60
  text "8" at 1080.61,1785 h60
  text "Dielectric 2" at 1490.52,1785 h60
  text "FR-4" at 2530.23,1785 h60
  text "10.00mil" at 3390,1785 h60
  text "4.2" at 4039.84,1785 h60
  text "9" at 1080.61,1665 h60
  text "Bottom Layer" at 1490.52,1665 h60
  text "Copper" at 2530.23,1665 h60
  text "1.40mil" at 3390,1665 h60
  text "10" at 1080.61,1545 h60
  text "Bottom Solder" at 1490.52,1545 h60
  text "Solder Resist" at 2530.23,1545 h60
  text "0.40mil" at 3390,1545 h60
  text "3.5" at 4039.84,1545 h60
  text "11" at 1080.61,1425 h60
  text "Bottom Overlay" at 1490.52,1425 h60

## Dimensions
0,2244.09 to -1.69,789.09 on Mechanical 1
0,2244.09 to -1.69,789.09 on Mechanical 1
-1476.38,2401.57 to 157.48,2283.46 on Mechanical 1
-1476.38,2401.57 to -748.03,-157.48 on Mechanical 1
-1476.38,314.96 to -1476.38,2401.57 on Mechanical 1

## Text inside footprints (layer, text, board x,y; h text height)
P1: Top Overlay "6" at -81.69,289.09 h35.43 r90; Top Overlay "10" at -81.69,849.09 h35.43 r90; Top Overlay "5" at 18.31,849.09 h35.43 r90; Top Overlay "1" at 18.31,289.09 h35.43 r90